# Altium PCB XT long bus with break-away tab (13.3 X 4.2 inches).PCBDOC
Units mil, origin at the board's own origin, x right, y up, seen from the top; angles counter-clockwise.
Board outline 13300 x 4950 mil, 10 copper layers (TopLayer, MidLayer1, MidLayer2, MidLayer3, MidLayer4, MidLayer5, MidLayer6, MidLayer7, MidLayer8, BottomLayer); 1 components, 0 nets, 101 pads, 0 vias.
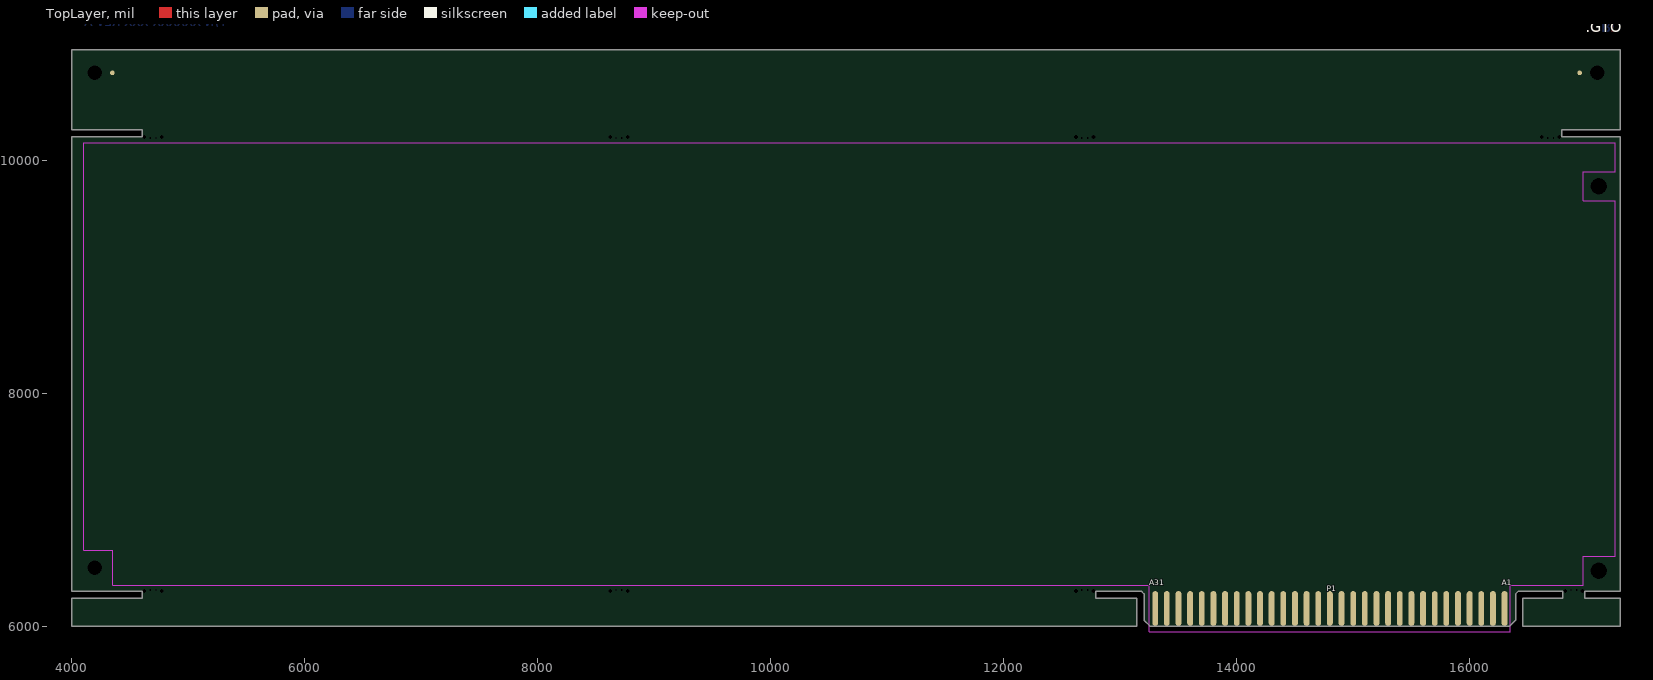
[diagram p0: TopLayer view]
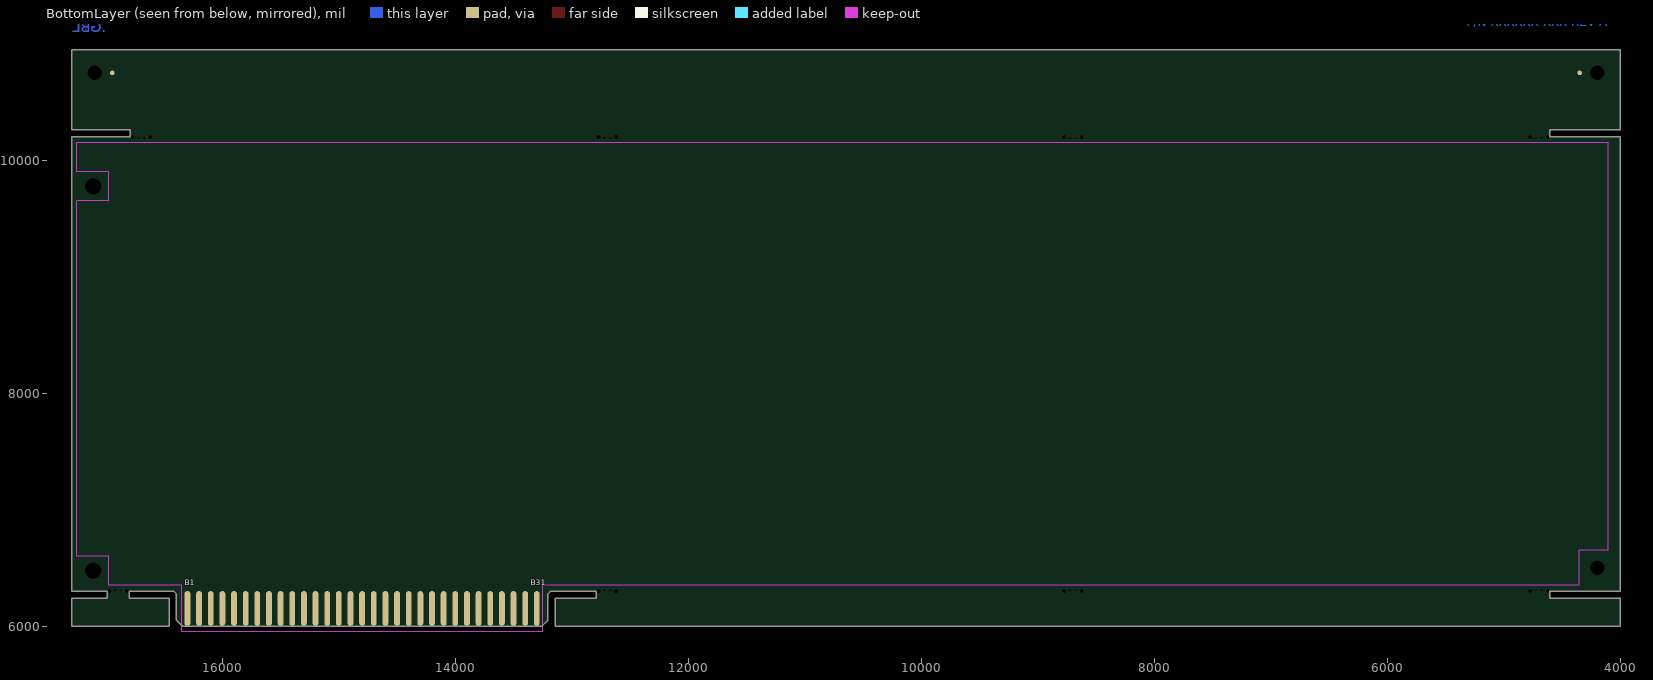
[diagram p1: BottomLayer view, seen from below]
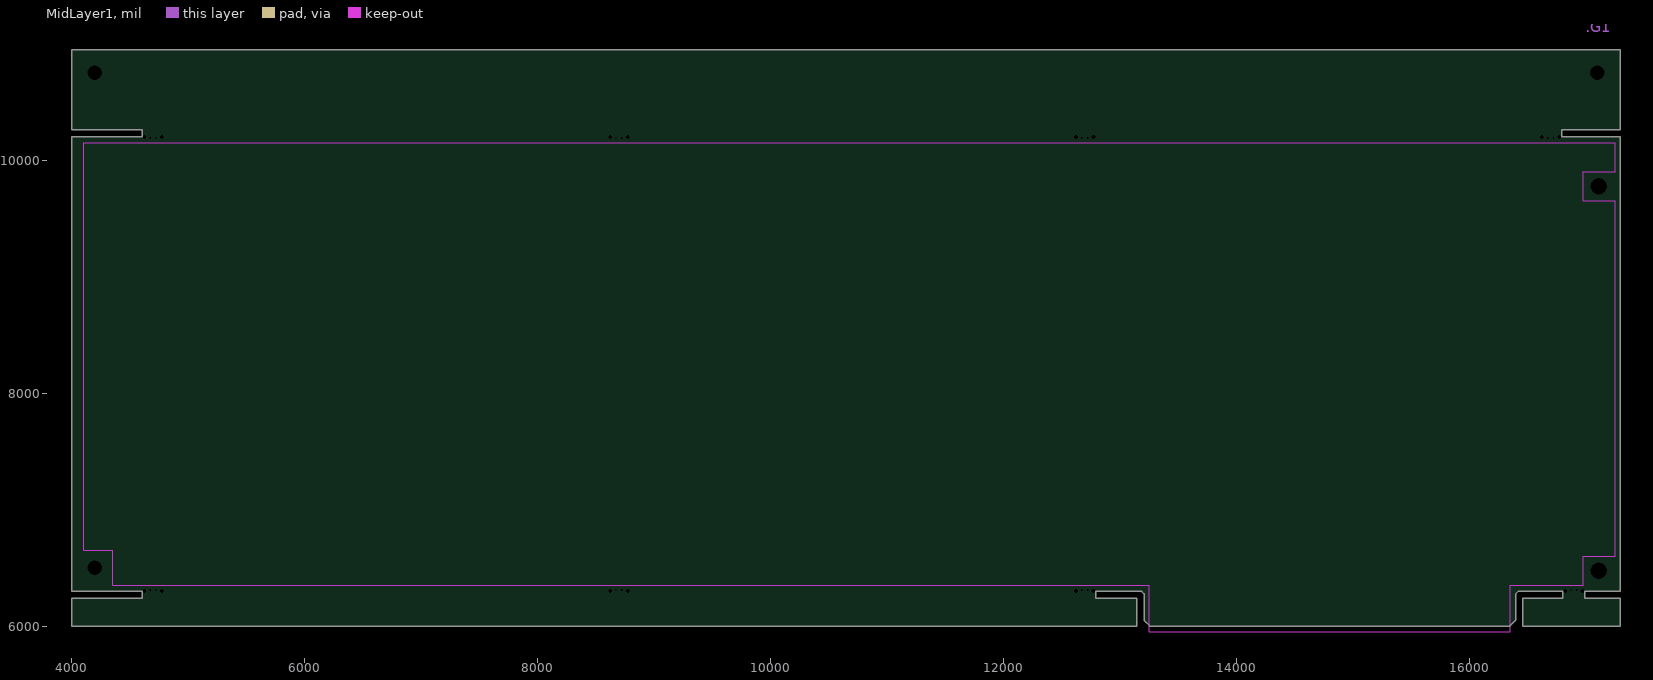
[diagram p2: MidLayer1]
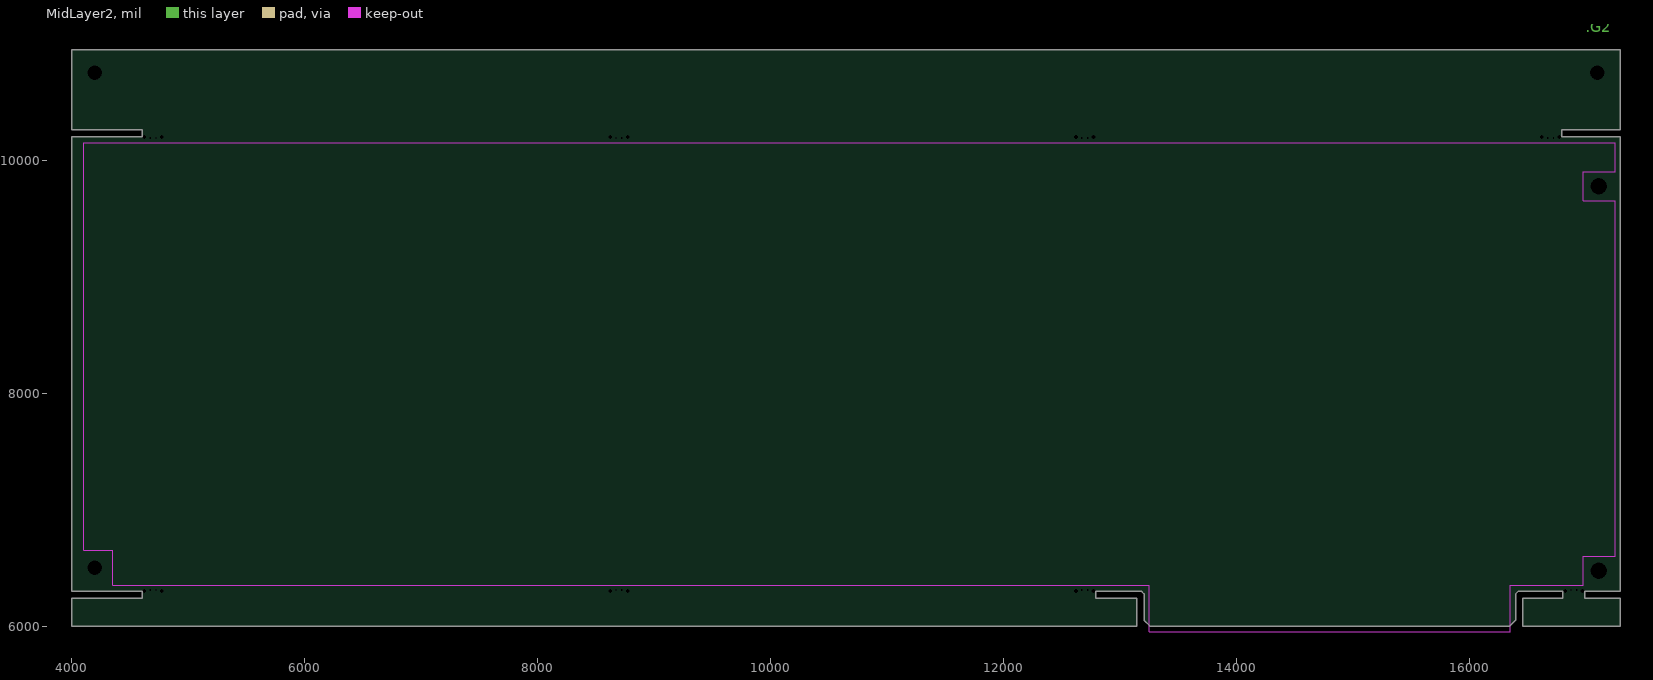
[diagram p3: MidLayer2]
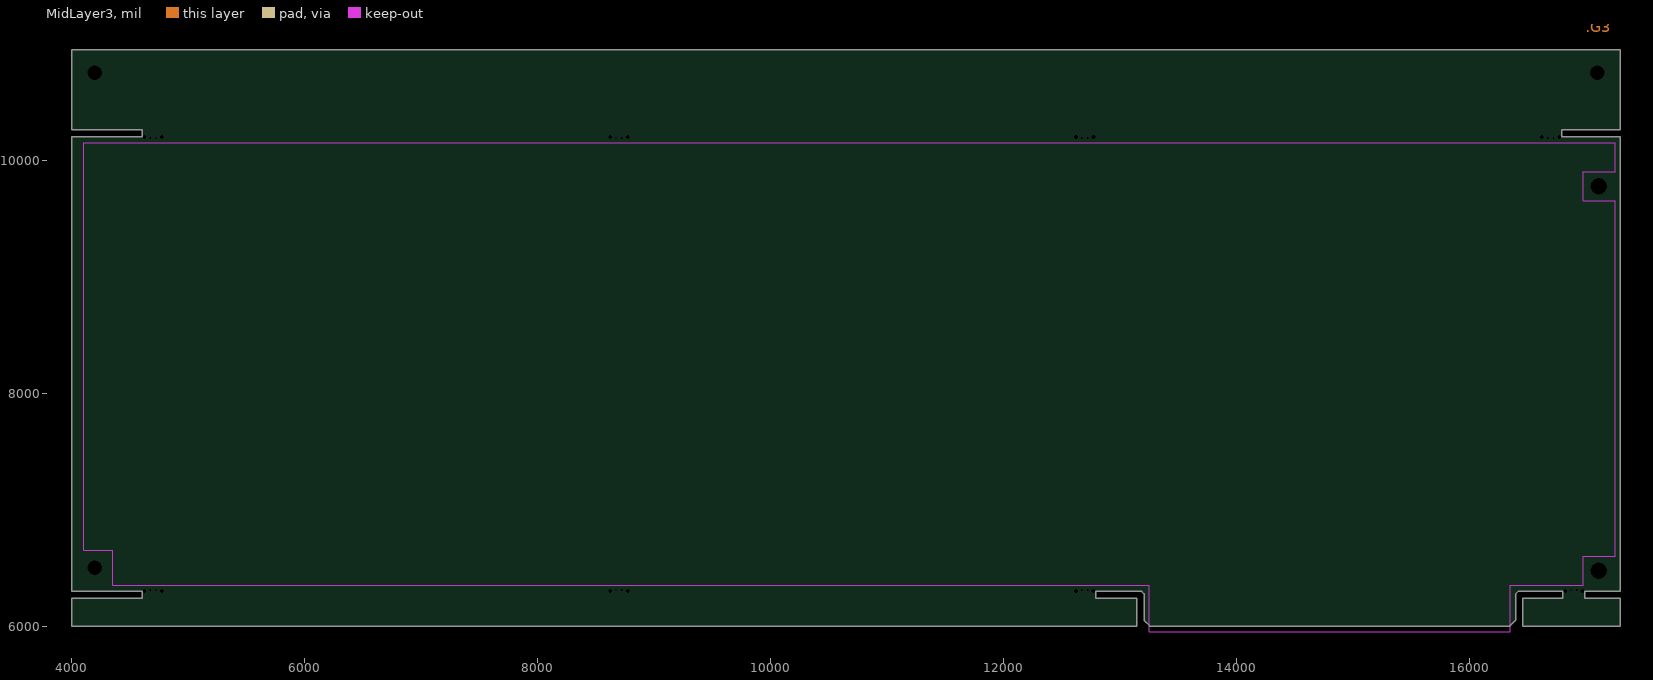
[diagram p4: MidLayer3]
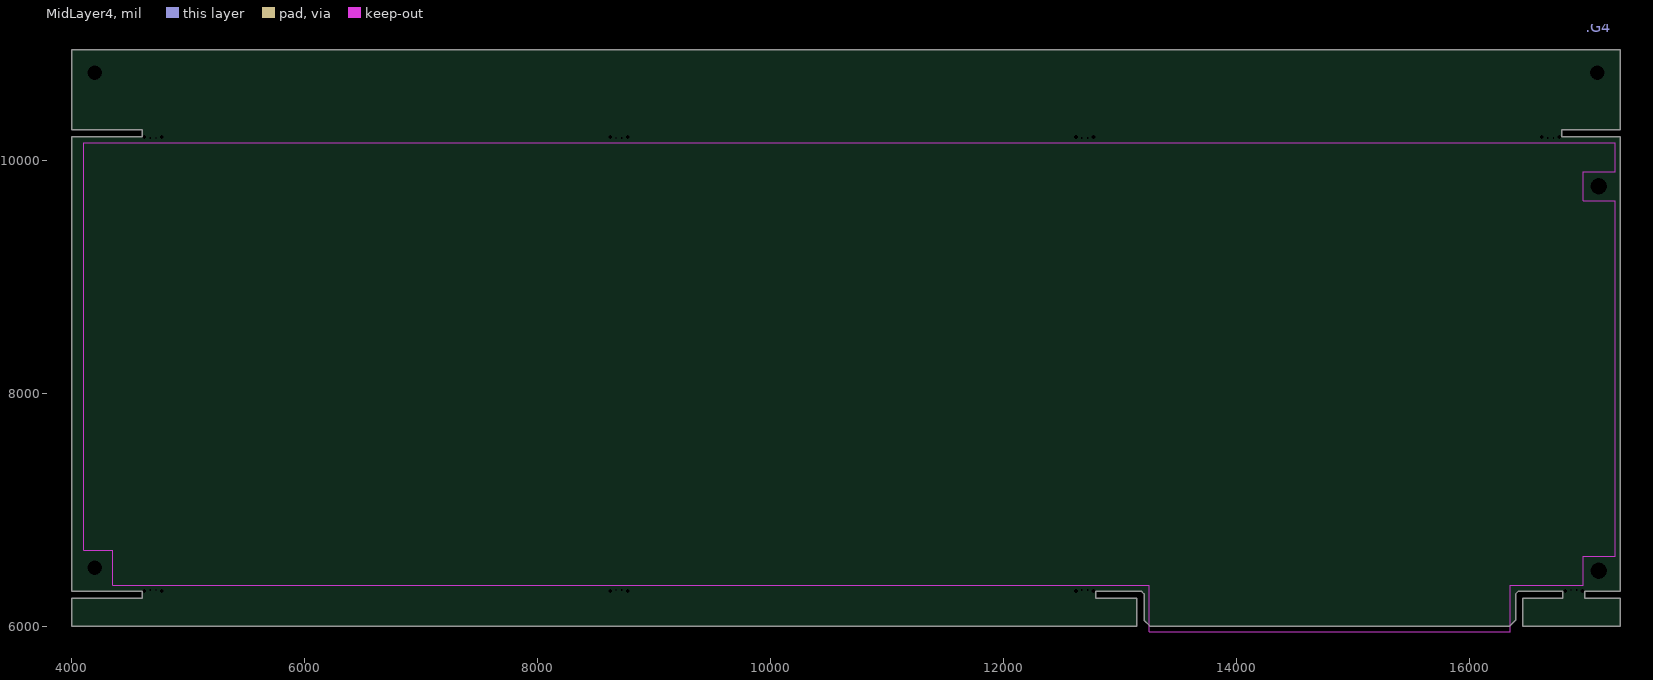
[diagram p5: MidLayer4]
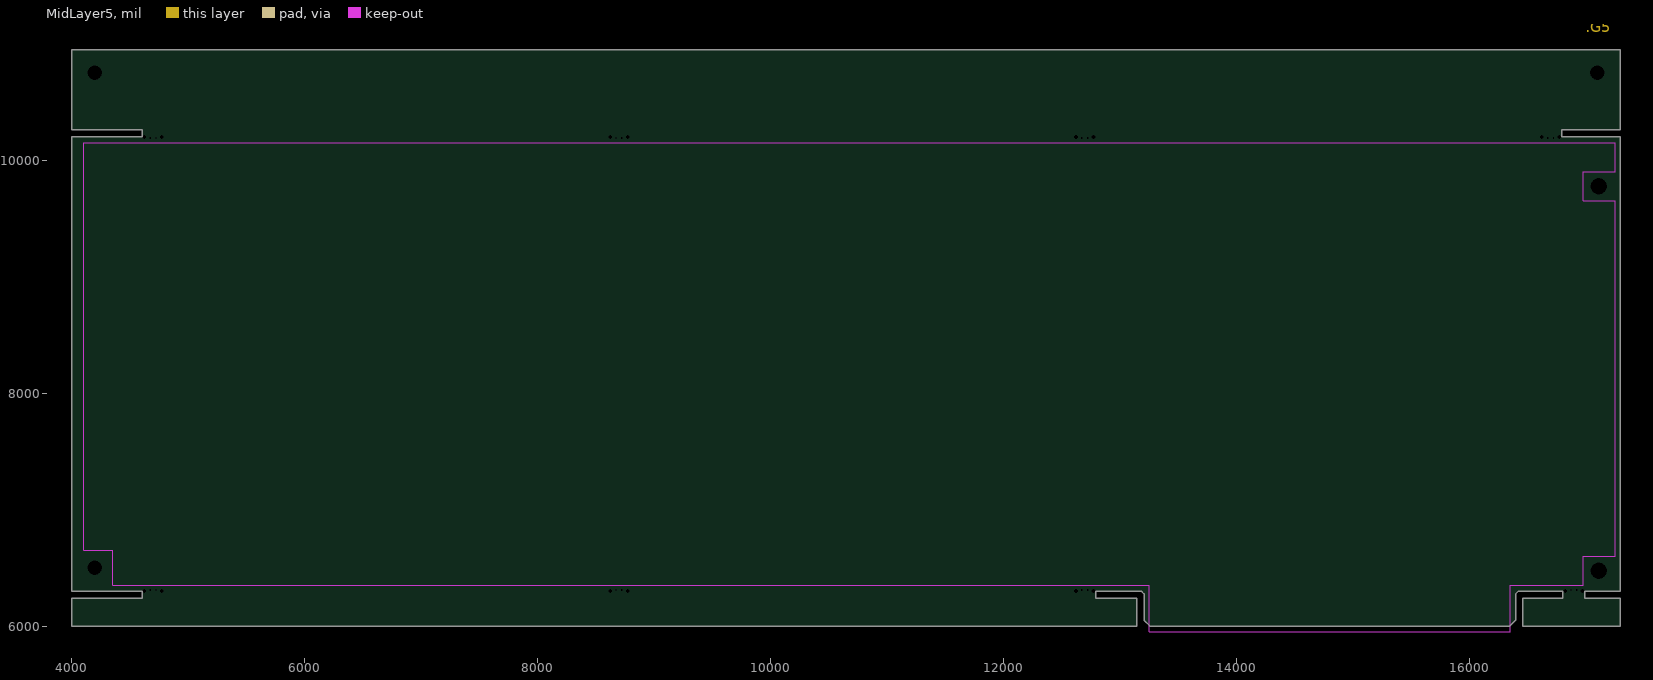
[diagram p6: MidLayer5]
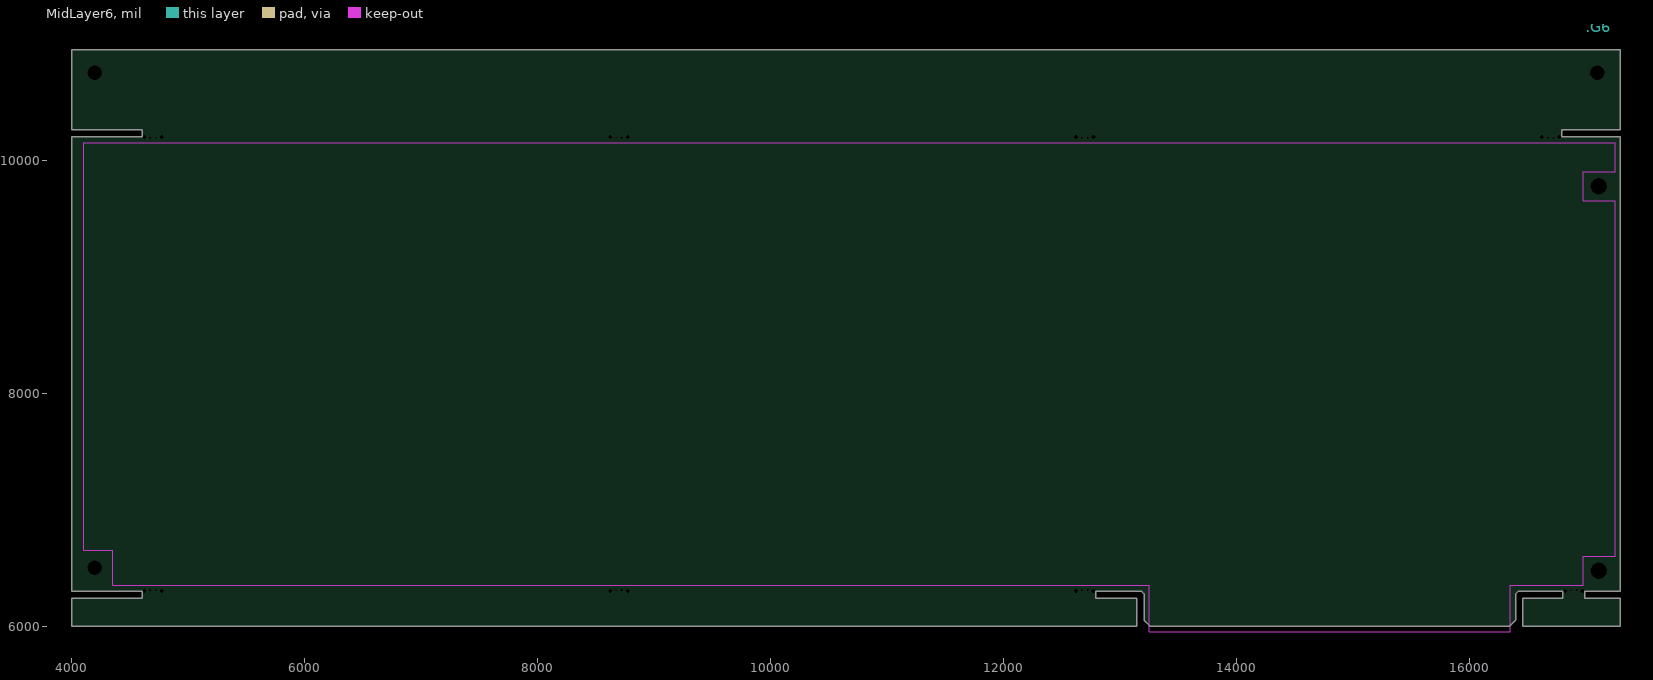
[diagram p7: MidLayer6]
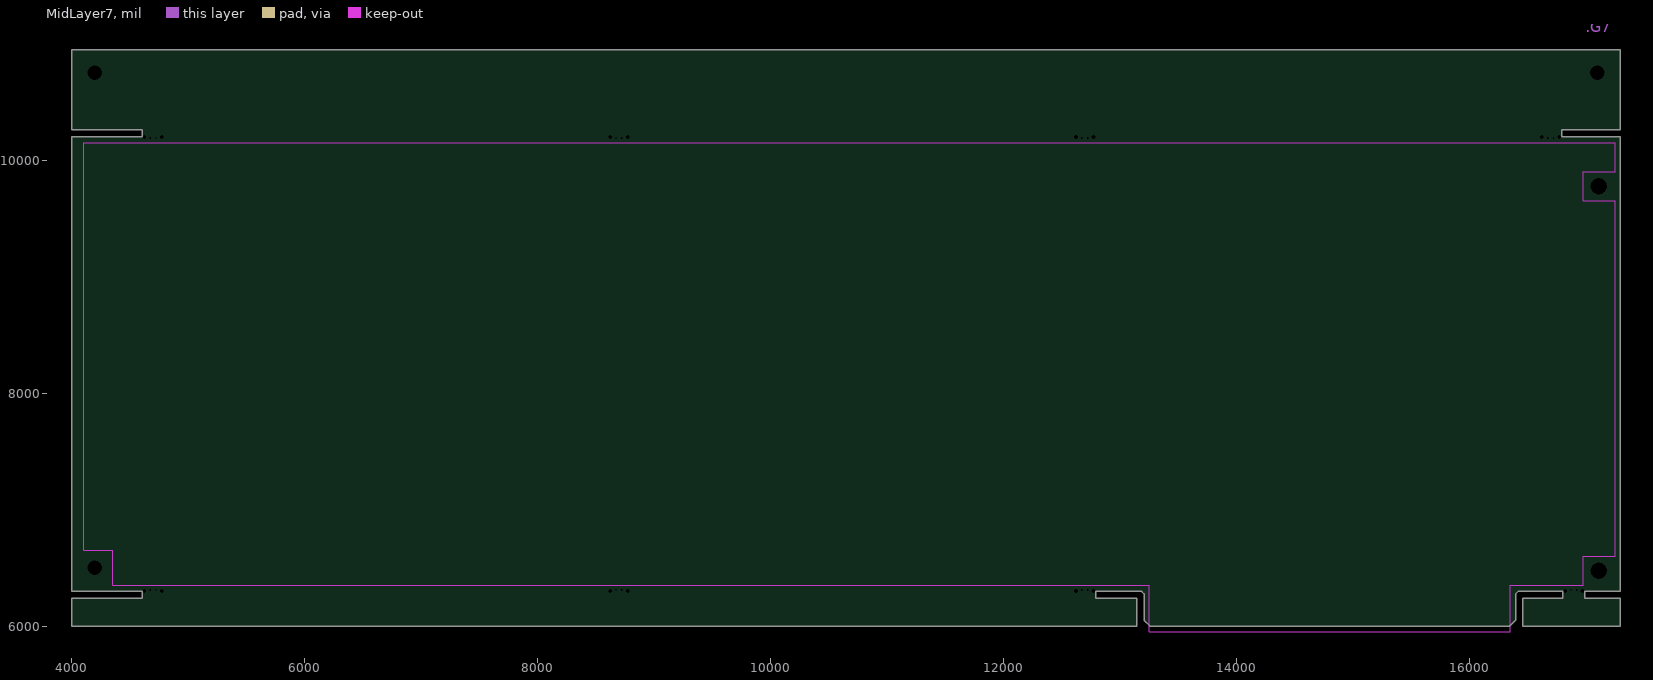
[diagram p8: MidLayer7]
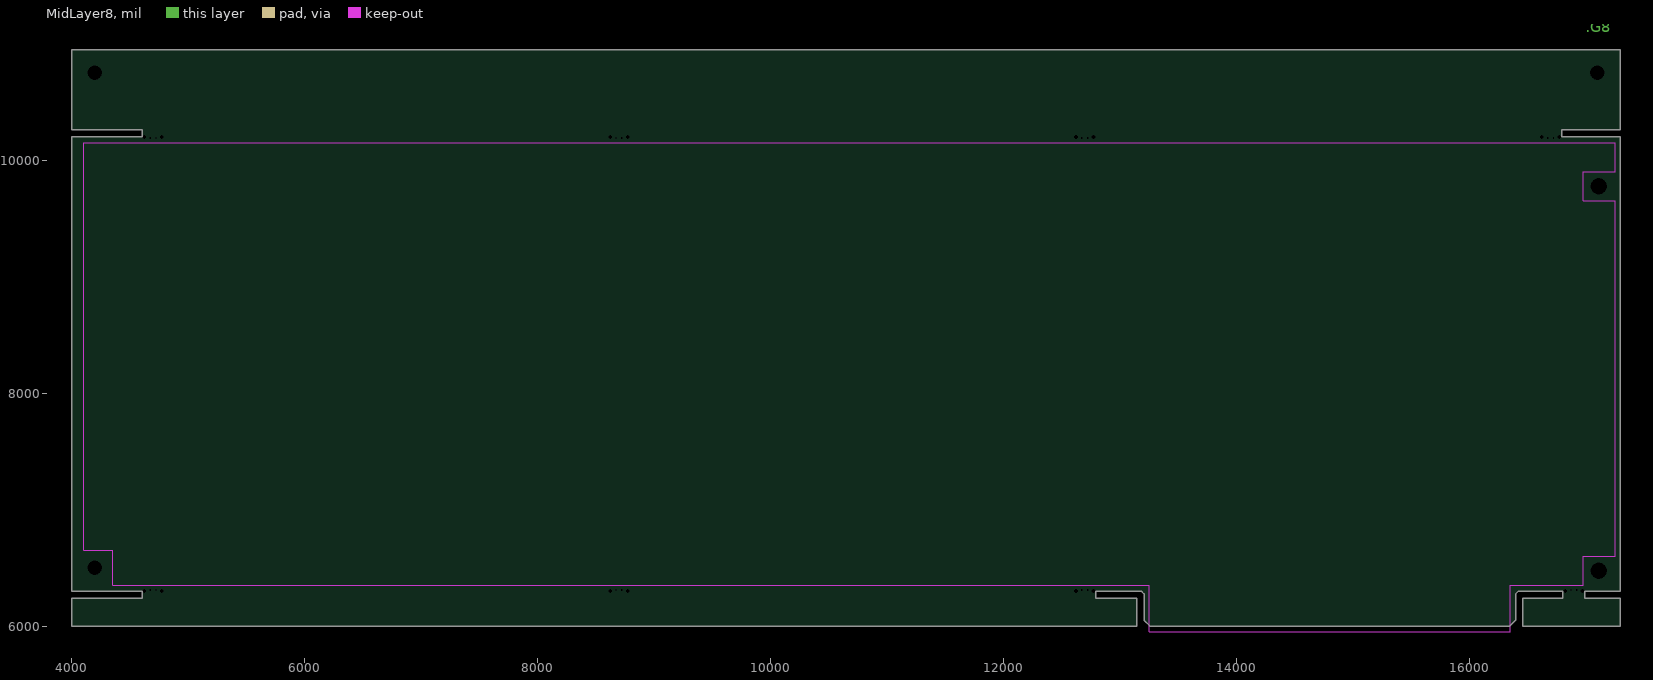
[diagram p9: MidLayer8]

## Layer stack, top to bottom
TopLayer: signal copper 1.4
Dielectric: core 12.6, FR-4, Dk 4.8
MidLayer1: signal copper 1.4
Dielectric: prepreg 12.6, FR-4, Dk 4.8
MidLayer2: signal copper 1.4
Dielectric: core 12.6, FR-4, Dk 4.8
MidLayer3: signal copper 1.4
Dielectric: prepreg 12.6, FR-4, Dk 4.8
MidLayer4: signal copper 1.4
Dielectric: core 12.6, FR-4, Dk 4.8
MidLayer5: signal copper 1.4
Dielectric: prepreg 12.6, FR-4, Dk 4.8
MidLayer6: signal copper 1.4
Dielectric: core 12.6, FR-4, Dk 4.8
MidLayer7: signal copper 1.4
Dielectric: prepreg 12.6, FR-4, Dk 4.8
MidLayer8: signal copper 1.4
Dielectric: core 12.6, FR-4, Dk 4.8
BottomLayer: signal copper 1.4

## Board outline
4000,6000 13148,6000 13148,6238 12795,6238 12795,6300 13185,6300 13210,6275 13210,6050 13260,6000 16350,6000 16400,6050 16400,6275 16425,6300 16805,6300 16805,6238 16462,6238 16462,6000 17300,6000 17300,6238 16995,6238 16995,6300 17300,6300 17300,10200 16795,10200 16795,10262 17300,10262 17300,10950 4000,10950 4000,10262 4605,10262 4605,10200 4000,10200 4000,6300 4605,6300 4605,6238 4000,6238

## Design rules (kind name [scope] priority, off if disabled: settings)
Clearance [All] p1: gap=10
FabricationTestPointUsage TestPointUsage [All] p1: valid=0 allowmultiple=FALSE
FabricationTestpoint Testpoint [All] p1: side=3 testpointundercomponent=TRUE minsize=40 maxsize=100 preferedsize=60 minholesize=20 maxholesize=40 preferedholesize=32 testpointgrid=1 allowsidetop=TRUE allowsidebottom=TRUE usegrid=TRUE gridtolerance=0.01
PasteMaskExpansion PasteMaskExpansion_1 [InComponent('P1')] p1: expansion=-150
PasteMaskExpansion [All] p2: expansion=0
PlaneClearance [All] p1: clearance=10
PolygonConnect [All] p1: connectstyle=Relief reliefconductorwidth=10 reliefentries=4 polygonreliefangle="90 Angle"
RoutingVias [All] p1: holewidth=28 width=50 viastyle="Through Hole" minholewidth=28 minwidth=50 maxholewidth=28 maxwidth=50
SilkscreenOverComponentPads [All] p1: minsilkscreentomaskgap=10
SolderMaskExpansion SolderMaskExpansion_1 [HasPad('Free-36')] p1: expansion=20
SolderMaskExpansion [HasPad('Free-35')] p2: expansion=20
SolderMaskExpansion SolderMaskExpansion_2 [All] p3: expansion=2
Width [All] p1: maxlimit=10 minlimit=10 preferedwidth=10
23 further rules are at their usual default settings.

## Components (designator, comment, footprint, x,y, rotation, side; value= is the part's Value field where it differs from the comment)
P1 "ECN-IBMXT" ECN-IBMXT 16305,6150 r0 top locked

## Footprints (in the part's own frame and the unit in brackets; to place one, negate y for a bottom-side part, rotate by r counter-clockwise, add the part's x,y. Pads: shape width x height; smd on the part's side, far side on the other; paste and mask are expansions set on the pad)
ECN-IBMXT [mil]
  oval 50x300 smd: A1(0,0) A2(-100,0) A3(-200,0) A4(-300,0) A5(-400,0) A6(-500,0) A7(-600,0) A8(-700,0) A9(-800,0) A10(-900,0) A11(-1000,0) A12(-1100,0) A13(-1200,0) A14(-1300,0) A15(-1400,0) A16(-1500,0) A17(-1600,0) A18(-1700,0) A19(-1800,0) A20(-1900,0) A21(-2000,0) A22(-2100,0) A23(-2200,0) A24(-2300,0) A25(-2400,0) A26(-2500,0) A27(-2600,0) A28(-2700,0) A29(-2800,0) A30(-2900,0) A31(-3000,0)
  oval 50x300 smd far side: B1(0,0) B2(-100,0) B3(-200,0) B4(-300,0) B5(-400,0) B6(-500,0) B7(-600,0) B8(-700,0) B9(-800,0) B10(-900,0) B11(-1000,0) B12(-1100,0) B13(-1200,0) B14(-1300,0) B15(-1400,0) B16(-1500,0) B17(-1600,0) B18(-1700,0) B19(-1800,0) B20(-1900,0) B21(-2000,0) B22(-2100,0) B23(-2200,0) B24(-2300,0) B25(-2400,0) B26(-2500,0) B27(-2600,0) B28(-2700,0) B29(-2800,0) B30(-2900,0) B31(-3000,0)

## Free pads (board coordinates)
  round 0 hole 32: 1(16625,10200) 4(16775,10200) 5(12625,10200) 8(12775,10200) 9(12775,6300) 12(12625,6300) 13(8625,10200) 16(8775,10200) 17(8775,6300) 20(8625,6300) 21(4625,10200) 24(4775,10200) 25(4775,6300) 28(4625,6300) 29(16975,6300) 32(16825,6300)
  round 0 hole 20: 2(16675,10190) 3(16725,10190) 6(12675,10190) 7(12725,10190) 10(12725,6310) 11(12675,6310) 14(8675,10190) 15(8725,10190) 18(8725,6310) 19(8675,6310) 22(4675,10190) 23(4725,10190) 26(4725,6310) 27(4675,6310) 30(16925,6310) 31(16875,6310)
  round 50 hole 140: 33(17115,6475) 34(17115,9775)
  round 40 / inner round 0 / far side round 40 all layers, no hole: 35(16950,10750) 36(4350,10750)
  round 50 hole 125: 37(17100,10750) 38(4200,10750) 39(4200,6500)

## Nets (pads, with @x,y where several pads share a name; then routed paths per layer and width w, separated by ;. In a path a pad name is that pad's centre, name@x,y a point inside that pad or via, vN(x,y) a via of type N, cw(c..) or ccw(c..) an arc to the next point about the centre after c; other vN are vias at no path point)
pads on no net: P1.A1 P1.A2 P1.A3 P1.A4 P1.A5 P1.A6 P1.A7 P1.A8 P1.A9 P1.A10 P1.A11 P1.A12 P1.A13 P1.A14 P1.A15 P1.A16 P1.A17 P1.A18 P1.A19 P1.A20 P1.A21 P1.A22 P1.A23 P1.A24 P1.A25 P1.A26 P1.A27 P1.A28 P1.A29 P1.A30 P1.A31 P1.B1 P1.B2 P1.B3 P1.B4 P1.B5 P1.B6 P1.B7 P1.B8 P1.B9 P1.B10 P1.B11 P1.B12 P1.B13 P1.B14 P1.B15 P1.B16 P1.B17 P1.B18 P1.B19 P1.B20 P1.B21 P1.B22 P1.B23 P1.B24 P1.B25 P1.B26 P1.B27 P1.B28 P1.B29 P1.B30 P1.B31

## Keep-outs
KeepOutLayer:
  lines w8: 4105,6650 4355,6650 4355,6350 13255,6350 13255,5950 16355,5950 16355,6350 16980,6350 16980,6600 17255,6600 17255,9650 16980,9650 16980,9900 17255,9900 17255,10150 4105,10150 4105,6650

## Other copper
TopLayer:
  text ".GTL" at 17000,11100 h90
MidLayer1:
  text ".G1" at 17000,11100 h90
MidLayer2:
  text ".G2" at 17000,11100 h90
MidLayer3:
  text ".G3" at 17000,11100 h90
MidLayer4:
  text ".G4" at 17000,11100 h90
MidLayer5:
  text ".G5" at 17000,11100 h90
MidLayer6:
  text ".G6" at 17000,11100 h90
MidLayer7:
  text ".G7" at 17000,11100 h90
MidLayer8:
  text ".G8" at 17000,11100 h90
BottomLayer:
  text "P/N XXXXXX-XXX REV A" at 5320,11150 h75
  text ".GBL" at 17000,11100 h90

## Silkscreen, mask and mechanical layers (free items; w line width, h text height)
TopOverlay:
  rectangle: 4281,11353 5031,11553
  rectangle: 4281,11643 5031,11843
  lines w10: 5392.59,11745.97 ccw(c5441,11785.5) 5392.71,11745.83
  text "C" at 5496,11748 h60
  text "2002 COMPANY NAME" at 5646,11748 h75
  text "S/N" at 4031,11700.5 h75
  text "BOARD NAME" at 5496,11573 h75
  text "ASSY NO.: XXXXXX" at 5496,11423 h75
  text "REV" at 4031,11403 h75
  text ".GTO" at 17000,11100 h90
TopPaste:
  text ".GTP" at 17000,11100 h90
BottomPaste:
  text ".GBP" at 17000,11100 h90
TopSolder:
  rectangle: 13180,5975 16430,6325
  text ".GTS" at 17000,11100 h90
BottomSolder:
  rectangle: 13180,5975 16430,6325
  text ".GBS" at 17000,11100 h90
Mechanical1:
  lines w20: 4000,6000 13148,6000 13148,6238 12795,6238 12795,6300 13185,6300 13210,6275 13210,6050 13260,6000 16350,6000 16400,6050 16400,6275 16425,6300 16805,6300 16805,6238 16462,6238 16462,6000 17300,6000 17300,6238 16995,6238 16995,6300 17300,6300 17300,10200 16795,10200 16795,10262 17300,10262 17300,10950 4000,10950 4000,10262 4605,10262 4605,10200 4000,10200 4000,6300 4605,6300 4605,6238 4000,6238 4000,6000 ; 4795,6238 8605,6238 8605,6300 4795,6300 4795,6238 ; 4795,10200 8605,10200 8605,10262 4795,10262 4795,10200 ; 8795,6238 12605,6238 12605,6300 8795,6300 8795,6238 ; 8795,10200 12605,10200 12605,10262 8795,10262 8795,10200 ; 12795,10200 16605,10200 16605,10262 12795,10262 12795,10200
Mechanical3:
  lines w10: 16990,6425 16990,6375 17040,6375 ; 16990,6450 16990,6500 ; 16990,6525 16990,6575 17040,6575 ; 16990,9725 16990,9675 17040,9675 ; 16990,9750 16990,9800 ; 16990,9825 16990,9875 17040,9875 ; 17065,6375 17115,6375 ; 17065,6575 17115,6575 ; 17065,9675 17115,9675 ; 17065,9875 17115,9875 ; 17140,6375 17190,6375 ; 17140,6575 17190,6575 ; 17140,9675 17190,9675 ; 17140,9875 17190,9875 ; 17215,6375 17265,6375 ; 17215,6575 17265,6575 ; 17215,9675 17265,9675 ; 17215,9875 17265,9875 ; 17300,6375 17340,6375 17340,5225 17365,5225 17365,9950 17790,9950 17790,9975 17340,9975 17340,9875 17300,9875 ; 17300,6575 17340,6575 17340,9675 17300,9675
Mechanical4:
  circle w10: c13265.68,6020.67 r100
  lines w10: 17970,8415 18045,8340 18120,8415 18195,8340 18270,8415 18345,8340 18420,8415 ; 18451.25,7333.75 18695,7090 18895,7090 ; 19595,8540 20320,8540 ; 20945,7090 20695,7090 20988.75,7383.75 ; 21895,7290 21895,7690 22095,7790 21695,7890 21895,7990 21895,8390 ; 13230,5880 13233.21,5900.36 13283.84,5878.87 13230,5880 ; 13283.68,5878.67 13338.68,5878.67 13333.68,5898.67 13283.68,5878.67 ; 18345,7440 18470,7352.5 18432.5,7315 18345,7440 ; 20970,7402.5 21007.5,7365 21095,7490 20970,7402.5
  lines w20: 17995,8390 17995,7490 18095,7390 18295,7390 18395,7490 18395,8390 ; 20995,8390 20995,7590 21195,7390 21895,7390
  text ".Pcb_File_Name_No_Path" at 15100,11290 h90
  text ".Printout_Name" at 15100,11100 h90
  text "DETAIL A" at 19595,8590 h120
  text "o" at 19620,7115 h60
  text "o" at 21670,7115 h60
  text ".020 X 45  CHAMFER" at 18970,7040 h90
  text "0.05 X 45  CHAMFER" at 21020,7040 h90
  text "BOTH SIDES" at 18970,6865 h90
  text "TYP 4 PLCS" at 21020,6865 h90
  text "ENTIRE LENGTH OF" at 18970,6690 h90
  text "EDGE CONNECTOR" at 18970,6515 h90
  text "SEE DETAIL A" at 13360,5850 h75
DrillDrawing:
  text ".LEGEND" at 17950,8940 h90
  text "Drilling Details." at 17950,8790 h90

## Dimensions
4200,5980 to 4000,5980 on Mechanical4
3980,6500 to 4000,6300 on Mechanical4

## Text inside footprints (layer, text, board x,y; h text height)
P1: TopOverlay "A1" at 16280,6350 h48; TopOverlay "A31" at 13255,6350 h48; BottomOverlay "B31" at 13355,6350 h48; BottomOverlay "B1" at 16330,6350 h48